# Altium PCB Sheer1.PcbDoc (part 1 of 2)
Units mil, origin at the board's own origin, x right, y up, seen from the top; angles counter-clockwise.
Board outline 7637.8 x 3799.21 mil, 2 copper layers (Top Layer, Bottom Layer); 236 components, 181 nets, 723 pads, 138 vias.
Unrouted connection lines stored in the file: 215.
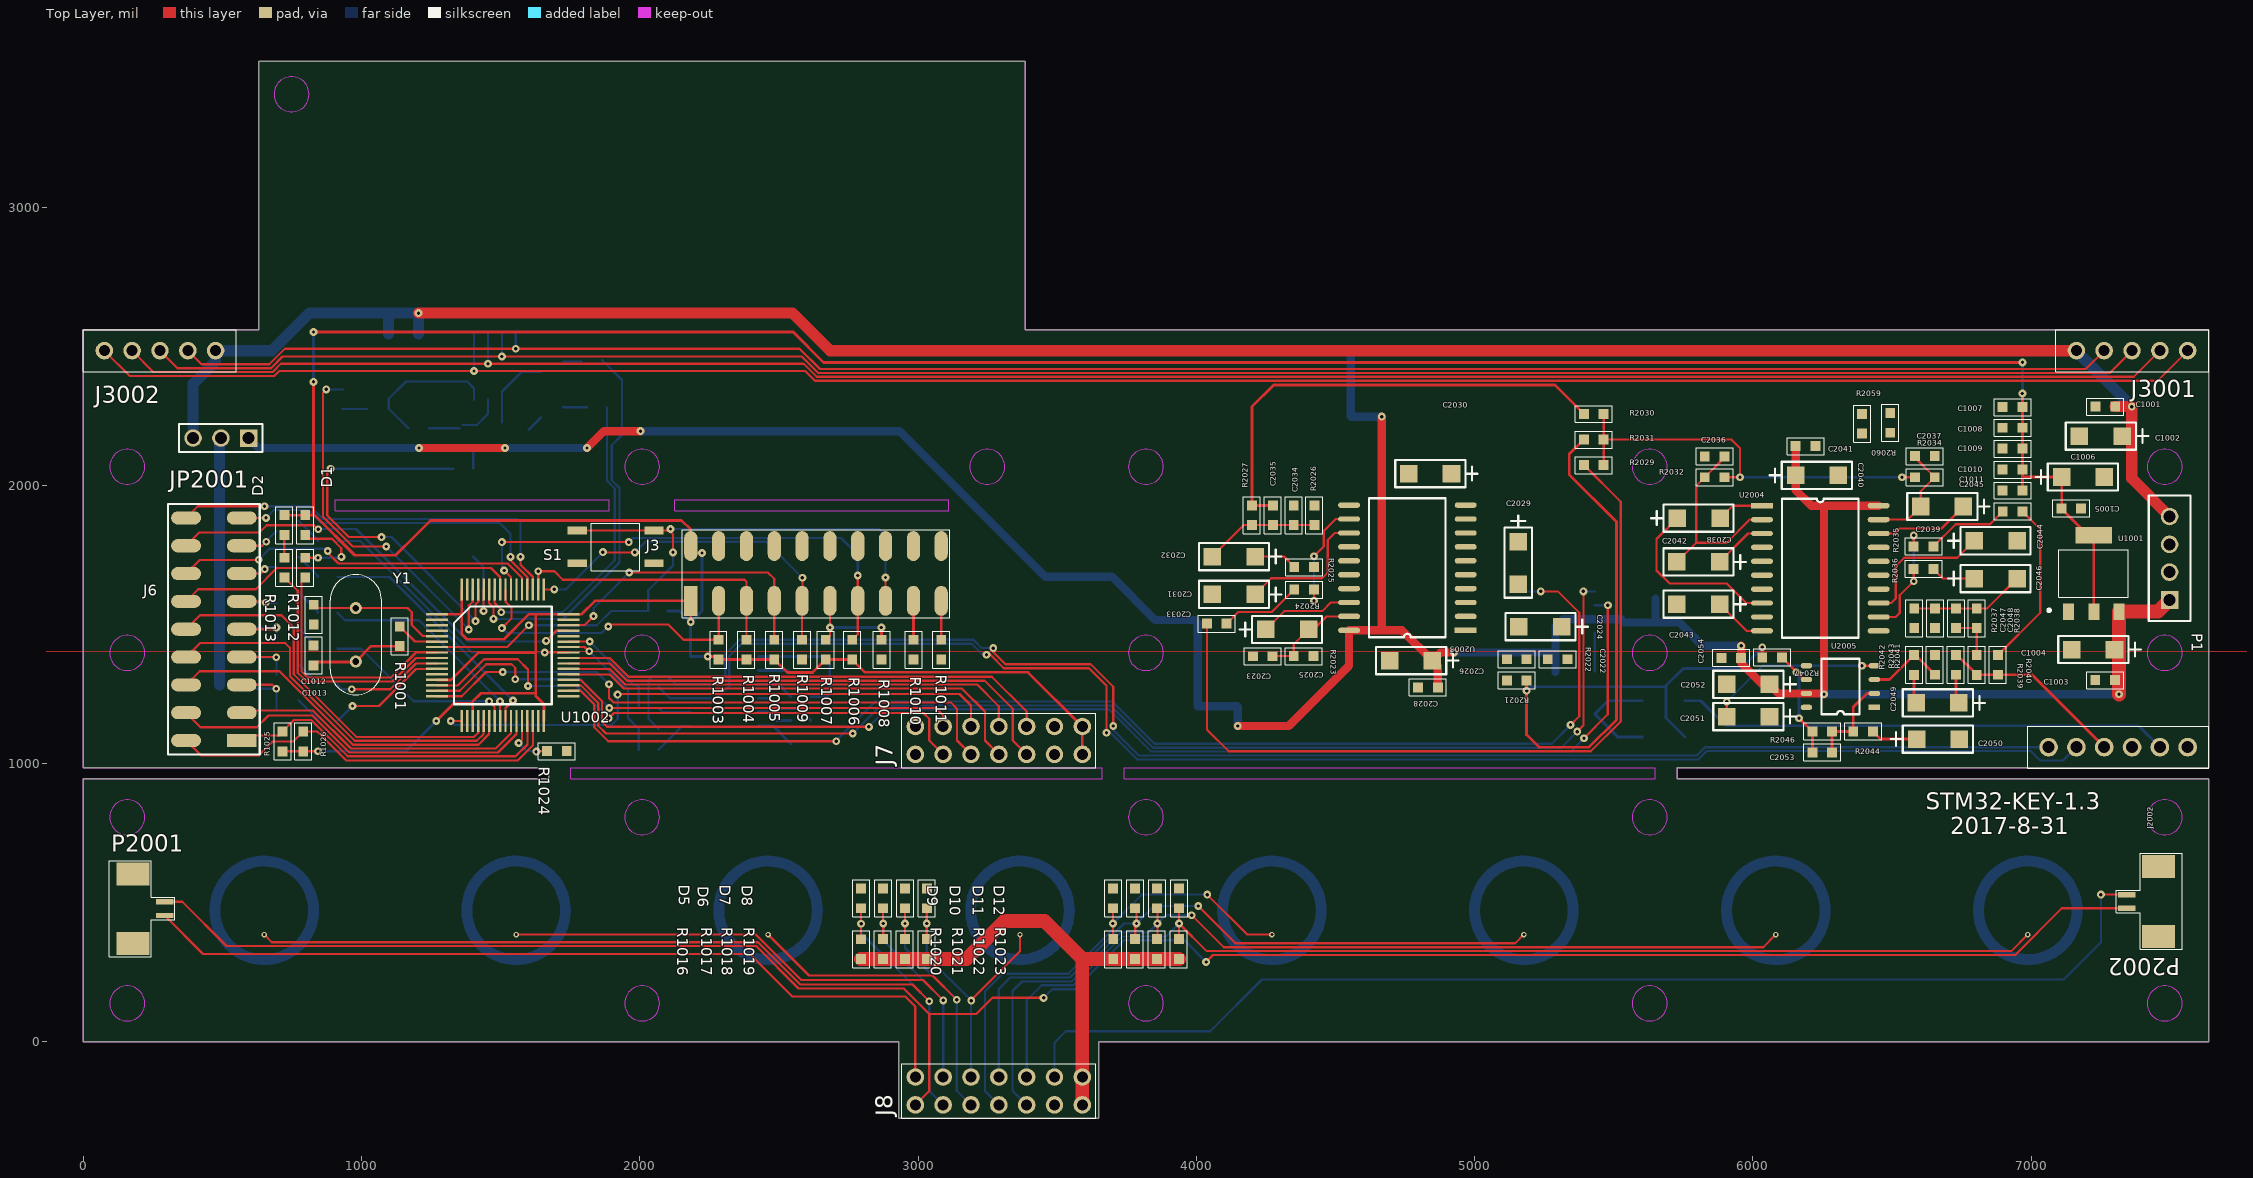
[diagram p0: Top Layer view]
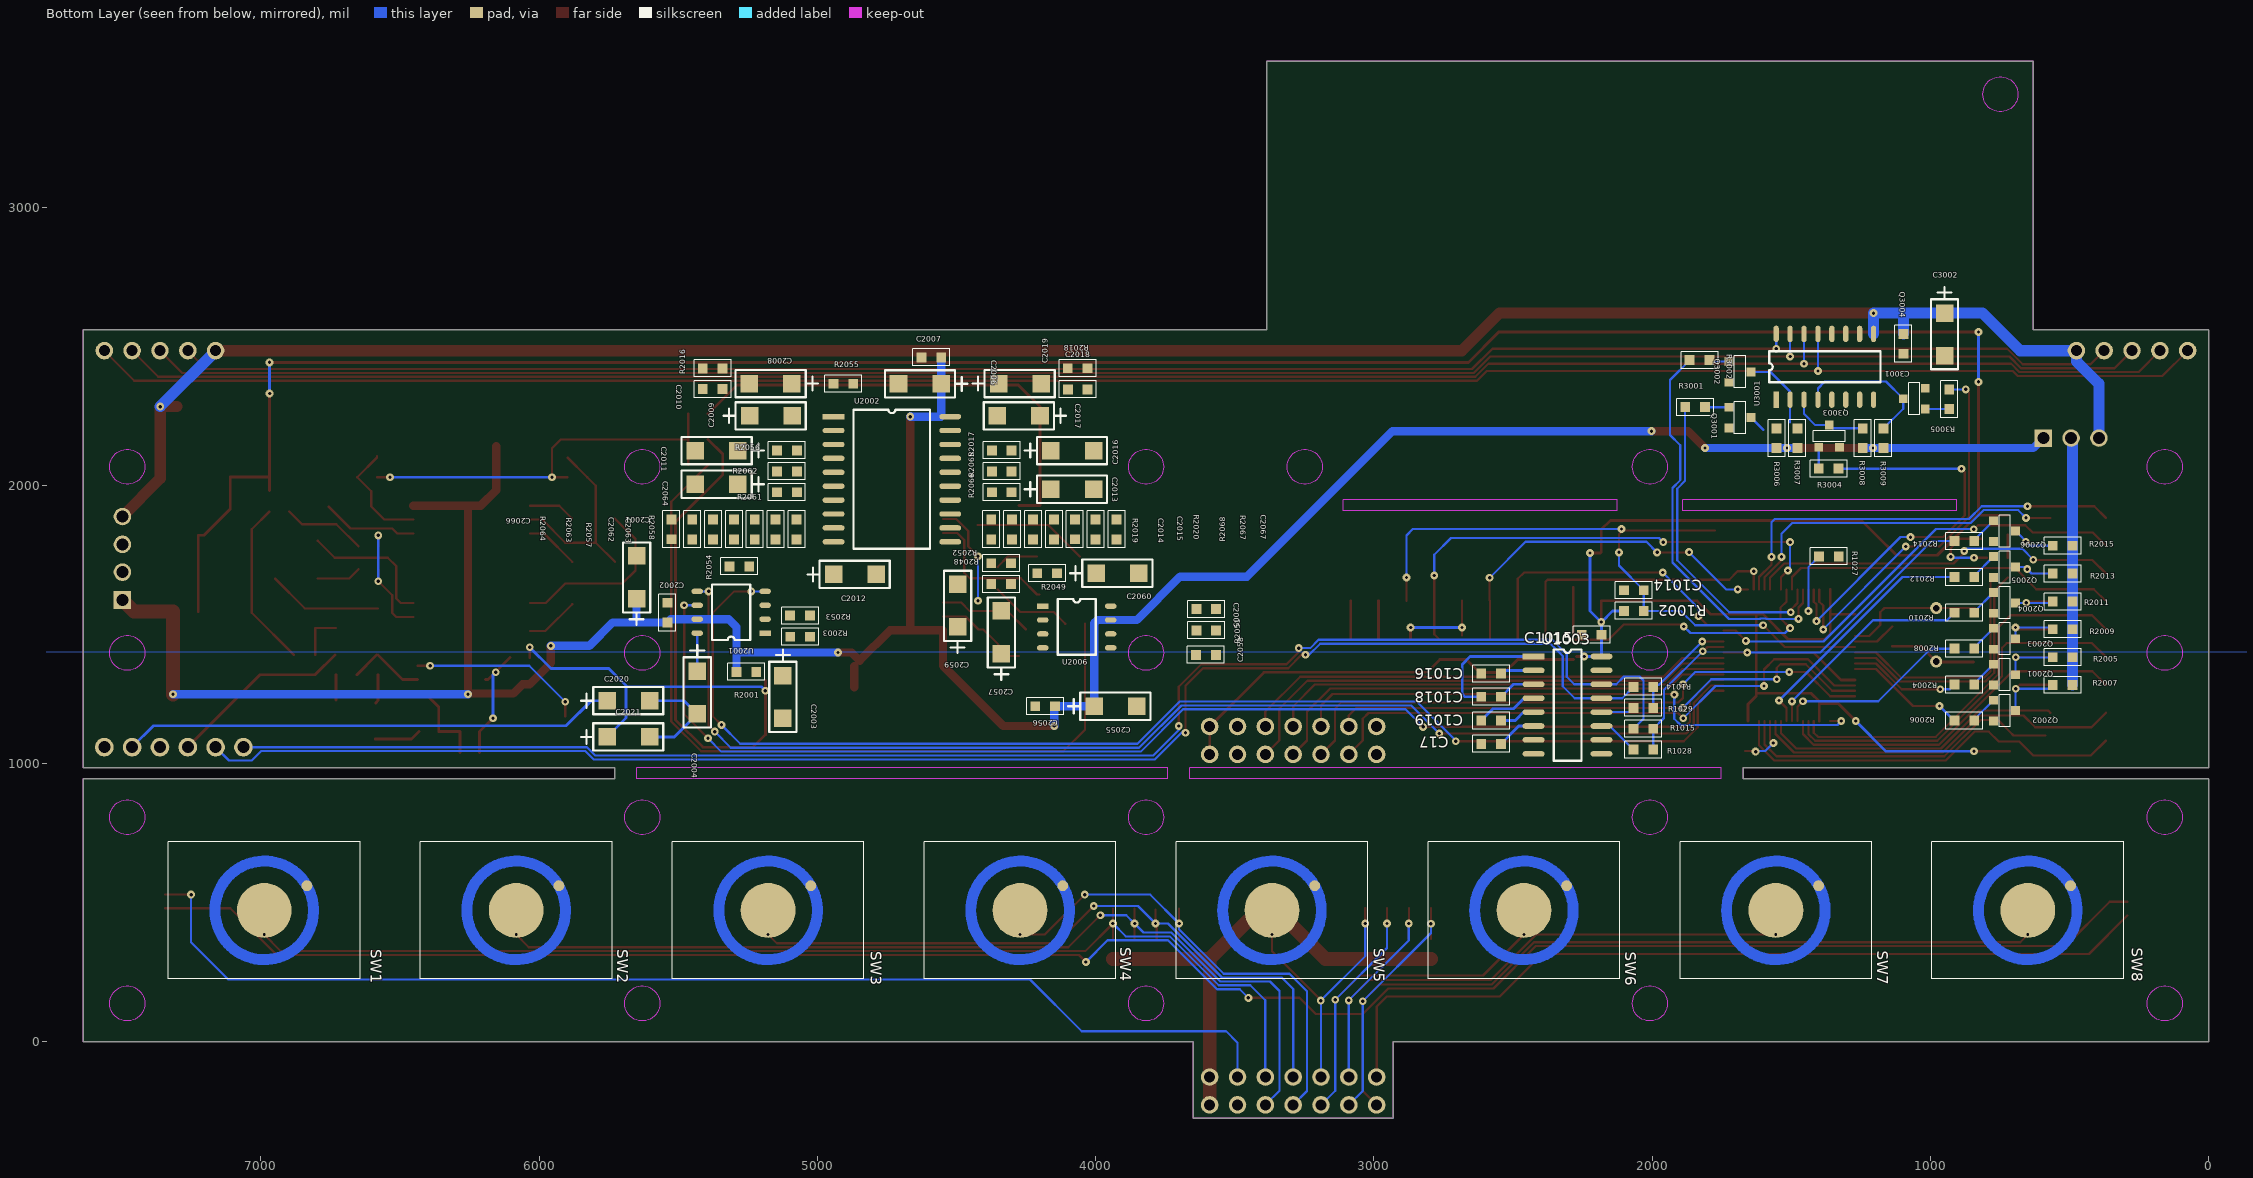
[diagram p1: Bottom Layer view, seen from below]

## Layer stack, top to bottom
Top Solder: solder mask 0.4, Solder Resist, Dk 3.5
Top Layer: signal copper 1.4
Dielectric 1: dielectric 12.6, FR-4, Dk 4.8
Bottom Layer: signal copper 1.4
Bottom Solder: solder mask 0.4, Solder Resist, Dk 3.5

## Board outline
0,0 0,944.88 1673.23,944.88 1673.23,984.25 0,984.25 0,2559.06 629.92,2559.06 629.92,3523.62 3385.83,3523.62 3385.83,2559.06 7637.8,2559.06 7637.8,984.25 5728.35,984.25 5728.35,944.88 7637.8,944.88 7637.8,0 3650,0 3650,-275.59 2930,-275.59 2930,0

## Design rules (kind name [scope] priority, off if disabled: settings)
Clearance [All] p1: gap=6
MinimumSolderMaskSliver [All] p1: minsoldermaskwidth=0
PolygonConnect [All] p1: connectstyle=Relief reliefconductorwidth=10 reliefentries=4 polygonreliefangle="90 Angle" airgapwidth=10
RoutingVias [All] p1: holewidth=28 width=50 viastyle="Through Hole" minholewidth=12 minwidth=20 maxholewidth=208 maxwidth=250
SilkToSolderMaskClearance [IsPad] p1: minsilkscreentomaskgap=0 clearancetoexposedcopper=TRUE
SolderMaskExpansion [All] p1: expansion=4
Width [All] p1: maxlimit=1000 minlimit=6 preferedwidth=10
28 further rules are at their usual default settings.

## Classes and differential pairs
component class Sheet1: C17 C1001 C1002 C1003 C1004 C1005 C1006 C1007 C1008 C1009 C1010 C1011 C1012 C1013 C1014 C1015 C1016 C1018 C1019 D1 D2 D5 D6 D7 D8 D9 D10 D11 D12 J3 J6 J7 J8 JP2001 P1 P2001 P2002 Q2001 Q2002 Q2003 Q2004 Q2005 Q2006 R1001 R1002 R1003 R1004 R1005 R1006 R1007 R1008 R1009 R1010 R1011 R1012 R1013 R1014 R1015 R1016 R1017 R1018 R1019 R1020 R1021 R1022 R1023 R1024 R1025 R1026 R1027 R1028 R1029 R2004 R2005 R2006 R2007 R2008 R2009 R2010 R2011 R2012 R2013 R2014 R2015 S1 SW1 SW2 SW3 SW4 SW5 SW6 SW7 SW8 U1001 U1002 U1003 Y1
component class Sheet3: C3001 C3002 J3001 J3002 Q3001 Q3002 Q3003 Q3004 R3001 R3002 R3004 R3005 R3006 R3007 R3008 R3009 U3001
component class Sheet2: C2001 C2002 C2003 C2004 C2005 C2006 C2007 C2008 C2009 C2010 C2011 C2012 C2013 C2014 C2015 C2016 C2017 C2018 C2019 C2020 C2021 C2022 C2023 C2024 C2025 C2026 C2028 C2029 C2030 C2031 C2032 C2033 C2034 C2035 C2036 C2037 C2038 C2039 C2040 C2041 C2042 C2043 C2044 C2045 C2046 C2047 C2048 C2049 C2050 C2051 C2052 C2053 C2054 C2055 C2056 C2057 C2058 C2059 C2060 C2062 C2063 C2064 C2066 C2067 J2002 R2001 R2003 R2016 R2017 R2018 R2019 R2020 R2021 R2022 R2023 R2024 R2025 R2026 R2027 R2029 R2030 R2031 R2032 R2034 R2035 R2036 R2037 R2038 R2039 R2040 R2041 R2042 R2043 R2044 R2046 R2047 R2048 R2049 R2051 R2052 R2053 R2054 R2055 R2056 R2057 R2058 R2059 R2060 R2061 R2062 R2063 R2064 R2065 R2066 R2067 R2068 U2001 U2002 U2003 U2004 U2005 U2006

## Components (designator, comment, footprint, x,y, rotation, side; value= is the part's Value field where it differs from the comment)
C17 "C1017" 0603 2614,1071 r180 bottom
C1001 "100PF" 0603 7232,2283 r0 top
C1002 "10UF" 7343 7201,2177 r0 top
C1003 "100PF" 0603 7231,1300 r0 top
C1004 "10UF" 7343 7174,1410 r0 top
C1005 "100PF" 0603 7180,1917 r180 top
C1006 "10UF" 7343 7236,2030 r180 top
C1007 "100nF" 0603 6898,2282 r0 top
C1008 "100nF" 0603 6898,2207 r0 top
C1009 "100nF" 0603 6898,2132 r0 top
C1010 "100nF" 0603 6898,2057 r0 top
C1011 "100nF" 0603 6898,1982 r0 top
C1012 "20pF" 0603 828,1571 r270 top
C1013 "20pF" 0603 827,1353 r90 top
C1014 "100nF" 0603 2030,1623 r0 bottom
C1015 "100nF" 0603 2253,1463 r180 bottom
C1016 "100nF" 0603 2614,1324 r180 bottom
C1018 "100nF" 0603 2614,1240 r180 bottom
C1019 "100nF" 0603 2614,1155 r180 bottom
C2001 "10UF" 7343 5650,1719 r270 bottom
C2002 "0.1UF" 0603 5539,1578 r270 bottom
C2003 "10UF" 7343 5124,1190 r90 bottom
C2004 "1UF" 7343 5432,1206 r90 bottom
C2005 "0.1UF" 0603 3638,1556 r180 bottom
C2006 "100UF" 7343 4681,2365 r180 bottom
C2007 "0.1UF" 0603 4555,2460 r0 bottom
C2008 "470UF" 7343 5218,2366 r180 bottom
C2009 "100UF" 7343 5118,2250 r0 bottom
C2010 "0.1UF" 0603 5412,2346 r180 bottom
C2011 "100UF" 7343 5412,2125 r180 bottom
C2012 "100UF" 7343 4816,1680 r0 bottom
C2013 "4.7UF" 7343 4035,1986 r0 bottom
C2014 "2200PF" 0603 4300,1806 r90 bottom
C2015 "2200PF" 0603 4225,1806 r90 bottom
C2016 "100UF" 7343 4035,2125 r0 bottom
C2017 "100UF" 7343 4326,2250 r180 bottom
C2018 "0.1UF" 0603 4029,2345 r0 bottom
C2019 "470UF" 7343 4223,2366 r0 bottom
C2020 "10UF" 7343 5630,1226 r0 bottom
C2021 "10UF" 7343 5630,1096 r0 bottom
C2022 "0.15UF" 0603 5263,1375 r0 top
C2023 "0.15UF" 0603 4274,1386 r180 top
C2024 "100UF" 7343 5187,1492 r0 top
C2025 "100UF" 7343 4376,1482 r180 top
C2026 "100UF" 7343 4722,1370 r0 top
C2028 "0.1UF" 0603 4868,1274 r180 top
C2029 "100UF" 7343 5157,1672 r90 top
C2030 "100UF" 7343 4791,2042 r0 top
C2031 "100UF" 7343 4085,1608 r0 top
C2032 "4.7UF" 7343 4085,1744 r0 top
C2033 "0.22UF" 0603 4038,1503 r0 top
C2034 "2200PF" 0603 4350,1928 r270 top
C2035 "2200PF" 0603 4275,1928 r270 top
C2036 "0.15UF" 0603 5898,2104 r180 top
C2037 "0.15UF" 0603 6583,2105 r0 top
C2038 "100UF" 7343 5755,1725 r0 top
C2039 "100UF" 7343 6631,1924 r0 top
C2040 "100UF" 7343 6280,2036 r180 top
C2041 "0.1UF" 0603 6154,2141 r0 top
C2042 "100UF" 7343 5855,1882 r180 top
C2043 "100UF" 7343 5755,1573 r0 top
C2044 "100UF" 7343 6922,1801 r180 top
C2045 "0.22UF" 0603 6969,1906 r180 top
C2046 "4.7UF" 7343 6922,1665 r180 top
C2047 "2200PF" 0603 6655,1487 r90 top
C2048 "2200PF" 0603 6730,1487 r90 top
C2049 "4.7UF" 7343 6615,1218 r0 top
C2050 "47UF" 7343 6715,1088 r180 top
C2051 "300UF" 7343 5934,1169 r0 top
C2052 "300UF" 7343 5934,1285 r0 top
C2053 "22PF" 0603 6285,1040 r180 top
C2054 "0.1UF" 0603 5958,1380 r180 top
C2055 "300UF" 7343 3879,1206 r0 bottom
C2056 "0.1UF" 0603 4146,1206 r0 bottom
C2057 "300UF" 7343 4339,1521 r270 bottom
C2058 "22PF" 0603 3568,1390 r0 bottom
C2059 "4.7UF" 7343 4496,1617 r270 bottom
C2060 "47UF" 7343 3872,1684 r0 bottom
C2062 "2200PF" 0603 5225,1806 r90 bottom
C2063 "2200PF" 0603 5150,1806 r90 bottom
C2064 "4.7UF" 7343 5412,2004 r180 bottom
C2066 "0.22UF" 0603 5524,1877 r270 bottom
C2067 "0.22UF" 0603 3925,1806 r90 bottom
C3001 "0.1UF" 0603 1096,2544 r270 bottom
C3002 "100uF" 7343 949,2493 r90 bottom
D1 "LED_BLUE" 0603 797,1822 r90 top
D2 "LED_BLUE" 0603 722,1822 r90 top
D5 "TVS*" 0603 2795.02,480 r90 top
D6 "TVS*" 0603 2873.76,480 r90 top
D7 "TVS*" 0603 2952.5,480 r90 top
D8 "TVS*" 0603 3031.24,480 r90 top
D9 "TVS*" 0603 3700.98,480 r90 top
D10 "TVS*" 0603 3779.72,480 r90 top
D11 "TVS*" 0603 3858.46,480 r90 top
D12 "TVS*" 0603 3937.2,480 r90 top
J3 "JTAG" SOP20 2183,1585 r90 top
J6 "SOPP18" SOP18 569,1083 r180 top
J7 "SIP2X7" DB2X7-2.54 2990,1033.27 r90 top
J8 "SIP2X7" DB2X7-2.54 2990,-226.57 r90 top
J2002 "SIP6" SIP6 7563,1059 r180 top
J3001 "SIP5" SIP5 7563,2484 r270 top
J3002 "SIP5" SIP5 75,2484 r90 top
JP2001 "SIP3" SIP3 594,2170 r180 top
P1 "SIP4" SIP4 7498,1588 r0 top
P2001 "SIP2" 1.25T-2P 292,454 r90 top
P2002 "SIP2" 1.25T-2P 7344,529 r270 top
Q2001 "BC-817" S9013 773,1357 r270 bottom
Q2002 "BC-817" S9013 773,1228 r270 bottom
Q2003 "BC-817" S9013 773,1486 r270 bottom
Q2004 "BC-817" S9013 773,1615 r270 bottom
Q2005 "BC-817" S9013 773,1744 r270 bottom
Q2006 "BC-817" S9013 773,1873 r270 bottom
Q3001 "BC-817" S9013 1724,2281 r270 bottom
Q3002 "BC-817" S9013 1724,2445 r270 bottom
Q3003 "BC-817" S9013 1401,2137 r180 bottom
Q3004 "BC-817" S9013 1018,2274 r90 bottom
R1001 "390R" 0603 1137,1422 r90 top
R1002 "10K" 0603 2030,1548 r0 bottom
R1003 "10K" 0603 2283,1445 r270 top
R1004 "10K" 0603 2383,1445 r270 top
R1005 "10K" 0603 2483,1445 r270 top
R1006 "10K" 0603 2763,1445 r270 top
R1007 "0R" 0603 2668,1445 r270 top
R1008 "10K" 0603 2868,1374 r90 top
R1009 "10K" 0603 2583,1374 r90 top
R1010 "10K" 0603 2983,1374 r90 top
R1011 "10K" 0603 3083,1374 r90 top
R1012 "1K" 0603 797,1669 r90 top
R1013 "1K" 0603 722,1669 r90 top
R1014 "0" 0603 1996,1275 r0 bottom
R1015 "0" 0603 1996,1125 r0 bottom
R1016 "10K" 0603 2795.28,298 r90 top
R1017 "10K" 0603 2874.02,369 r270 top
R1018 "10K" 0603 2952.76,369 r270 top
R1019 "10K" 0603 3031.5,369 r270 top
R1020 "10K" 0603 3701.24,369 r270 top
R1021 "10K" 0603 3779.98,369 r270 top
R1022 "10K" 0603 3858.72,369 r270 top
R1023 "10K" 0603 3937.46,369 r270 top
R1024 "10K" 0603 1666,1045 r0 top
R1025 "10K" 0603 715,1044 r90 top
R1026 "10K" 0603 790,1044 r90 top
R1027 "10K" 0603 1329,1744 r0 bottom
R1028 "0" 0603 1996,1050 r0 bottom
R1029 "0" 0603 1996,1200 r0 bottom
R2001 "330R" 0603 5220,1329 r0 bottom
R2003 "330R" 0603 5027,1456 r0 bottom
R2004 "3.3K" 0603 913,1284 r180 bottom
R2005 "10K" 0603 489,1382 r0 bottom
R2006 "3.3K" 0603 913,1155 r180 bottom
R2007 "10K" 0603 560,1283 r180 bottom
R2008 "3.3K" 0603 913,1413 r180 bottom
R2009 "10K" 0603 560,1483 r180 bottom
R2010 "3.3K" 0603 913,1542 r180 bottom
R2011 "10K" 0603 560,1583 r180 bottom
R2012 "3.3K" 0603 913,1671 r180 bottom
R2013 "10K" 0603 560,1683 r180 bottom
R2014 "3.3K" 0603 913,1800 r180 bottom
R2015 "10K" 0603 560,1783 r180 bottom
R2016 "4.7R" 0603 5341,2420 r0 bottom
R2017 "330R" 0603 4302,2125 r0 bottom
R2018 "4.7R" 0603 4100,2421 r180 bottom
R2019 "4.7K" 0603 4375,1806 r90 bottom
R2020 "10K" 0603 4150,1806 r90 bottom
R2021 "0" 0603 5187,1299 r180 top
R2022 "0" 0603 5116,1375 r0 top
R2023 "0" 0603 4350,1387 r0 top
R2024 "0" 0603 4352.02,1626 r0 top
R2025 "0" 0603 4352.02,1707 r0 top
R2026 "4.7K" 0603 4425.02,1928 r270 top
R2027 "10K" 0603 4200,1928 r270 top
R2029 "0" 0603 5393,2073 r0 top
R2030 "0" 0603 5393,2257 r0 top
R2031 "0" 0603 5393,2165 r0 top
R2032 "0" 0603 5898,2029 r180 top
R2034 "0" 0603 6654,2029 r180 top
R2035 "0" 0603 6649,1780 r180 top
R2036 "0" 0603 6649,1699 r180 top
R2037 "4.7K" 0603 6580,1487 r90 top
R2038 "10K" 0603 6805,1487 r90 top
R2039 "0" 0603 6805,1319 r90 top
R2040 "0" 0603 6881,1390 r270 top
R2041 "0" 0603 6730,1390 r270 top
R2042 "1K" 0603 6579,1319 r90 top
R2043 "47K" 0603 6655,1390 r270 top
R2044 "1K" 0603 6432,1115 r180 top
R2046 "10K" 0603 6285,1115 r180 top
R2047 "0" 0603 6105,1381 r180 top
R2048 "1K" 0603 4375,1645 r180 bottom
R2049 "1K" 0603 4139,1684 r0 bottom
R2051 "10K" 0603 3567,1478 r0 bottom
R2052 "47K" 0603 4375,1720 r180 bottom
R2053 "0" 0603 5098,1532 r180 bottom
R2054 "0" 0603 5245,1709 r0 bottom
R2055 "0" 0603 4871,2365 r0 bottom
R2056 "330R" 0603 5074,2125 r0 bottom
R2057 "10K" 0603 5300,1806 r90 bottom
R2058 "4.7K" 0603 5075,1806 r90 bottom
R2059 "0" 0603 6393,2186 r90 top
R2060 "0" 0603 6494,2260 r270 top
R2061 "0" 0603 5074,1975 r0 bottom
R2062 "0" 0603 5074,2050 r0 bottom
R2063 "0" 0603 5375,1806 r90 bottom
R2064 "0" 0603 5450,1806 r90 bottom
R2065 "0" 0603 4302,2050 r0 bottom
R2066 "0" 0603 4302,1975 r0 bottom
R2067 "0" 0603 4000,1806 r90 bottom
R2068 "0" 0603 4074,1877 r270 bottom
R3001 "3.3K" 0603 1881,2281 r180 bottom
R3002 "3.3K" 0603 1865,2450 r180 bottom
R3004 "3.3K" 0603 1330,2060 r0 bottom
R3005 "3.3K" 0603 932,2345 r270 bottom
R3006 "10K" 0603 1553,2134 r90 bottom
R3007 "10K" 0603 1477,2205 r270 bottom
R3008 "10K" 0603 1243,2205 r270 bottom
R3009 "10K" 0603 1168,2205 r270 bottom
S1 "INT0" SW 1775,1838 r270 top (schematic designator SW1)
SW1 "KEYPAD_D5_3_5" AJB-9MM 6988.19,472.44 r180 bottom (schematic designator SW9)
SW2 "KEYPAD_D5_3_5" AJB-9MM 6082.68,472.44 r180 bottom (schematic designator SW8)
SW3 "KEYPAD_D5_3_5" AJB-9MM 5177.17,472.44 r180 bottom (schematic designator SW7)
SW4 "KEYPAD_D5_3_5" AJB-9MM 4271.65,472.44 r180 bottom (schematic designator SW6)
SW5 "KEYPAD_D5_3_5" AJB-9MM 3366.14,472.44 r180 bottom
SW6 "KEYPAD_D5_3_5" AJB-9MM 2460.63,472.44 r180 bottom (schematic designator SW4)
SW7 "KEYPAD_D5_3_5" AJB-9MM 1555.12,472.44 r180 bottom (schematic designator SW3)
SW8 "KEYPAD_D5_3_5" AJB-9MM 649.61,472.44 r180 bottom (schematic designator SW2)
U1001 "LM1117" LM1117 7135,1546 r0 top
U1002 "STM32F103R8T6" STM32F103R8T6 1271,1537 r0 top
U1003 "SP3232E" SP3232E-SOIC 2426,1385 r180 bottom
U2001 "LM1971" TJA1040 5188,1469 r0 bottom
U2002 "TEA2025B" TEA2025B 4942,2247 r180 bottom
U2003 "TEA2025B" TEA2025B 4968,1479 r180 top
U2004 "TEA2025B" TEA2025B 6033,1927 r0 top
U2005 "NE5534" SP2526A 6437,1202 r180 top
U2006 "NE5534" SP2526A 4190,1566 r180 bottom
U3001 "ULN2003" ULN2003A 1554,2308 r90 bottom
Y1 "8MHz" HC-49S 979,1559 r270 top

## Footprints (in the part's own frame and the unit in brackets; to place one, negate y for a bottom-side part, rotate by r counter-clockwise, add the part's x,y. Pads: shape width x height; smd on the part's side, far side on the other; paste and mask are expansions set on the pad)
1.25T-2P [mm]
  rect 0.5x1.6 smd: 1(0,0) 2(1.25,0)
  rect 2.1x3 smd: 3(3.8,2.9) 4(-2.55,2.9)
  silkscreen extent -3.76,-0.94 5,5.08
0603 [mm]
  rect 0.9x0.9 smd: 1(0,0) 2(1.8,0)
  silkscreen extent -0.79,-0.79 2.59,0.76
7343 [mm]
  rect 1.6x1.6 smd: 1(3.2,0) 2(-0.7,0)
  silkscreen extent -1.93,-1.24 5.59,1.24
AJB-9MM [mm]
  round 5 smd: 1(0,0)
  round 1 smd: 2(3.897,2.25)
  Top Layer circle w1: c0,0 r4.5
  silkscreen extent -8.75,-6.25 8.75,6.25
DB2X7-2.54 [mm]
  round 1.6 hole 1: 1(0,0) 2(2.54,0) 3(0,-2.54) 4(2.54,-2.54) 5(0,-5.08) 6(2.54,-5.08) 7(0,-7.62) 8(2.54,-7.62) 9(0,-10.16) 10(2.54,-10.16) 11(0,-12.7) 12(2.54,-12.7) 13(0,-15.24) 14(2.54,-15.24)
  silkscreen extent -1.23,-16.47 3.77,1.23
HC-49S [mm]
  round 1.1 hole 0.6: 1(0,0) 2(4.88,0)
  silkscreen extent -3.05,-2.35 7.93,2.35
LM1117 [mm]
  rect 1x1.5 smd: 1(0,0) 2(2.3,0) 3(4.6,0)
  rect 3.3x1.5 smd: 4(2.3,6.98)
  silkscreen extent -1.9,0 5.46,5.64
S9013 [mm]
  rect 0.8x0.8 smd: 1(0,0) 2(1.9,0) 3(0.95,2.02)
  silkscreen extent -0.51,0.51 2.41,1.52
SIP3 [mm]
  rect 1.6x1.6 hole 1.1: 1(0,0)
  round 1.6 hole 1.1: 2(2.54,0) 3(5.08,0)
  silkscreen extent -1.27,-1.27 6.35,1.27
SIP4 [mm]
  rect 1.6x1.6 hole 1.1: 1(0,0)
  round 1.6 hole 1.1: 2(0,2.54) 3(0,5.08) 4(0,7.62)
  silkscreen extent -1.91,-1.91 1.91,9.53
SIP5 [mm]
  round 1.6 hole 1: 1(0,0) 2(0,-2.54) 3(0,-5.08) 4(0,-7.62) 5(0,-10.16)
  silkscreen extent -1.91,-12.06 1.91,1.91
SIP6 [mm]
  round 1.7 hole 1.1: 1(0,0) 2(2.54,0) 3(5.08,0) 4(7.62,0) 5(10.16,0) 6(12.7,0)
  silkscreen extent -1.91,-1.91 14.6,1.91
SOP18 [mm]
  rect 2.73x1.2 smd: 1(0,0)
  oval 2.73x1.2 smd: 2(5.08,0) 3(0,-2.54) 4(5.08,-2.54) 5(0,-5.08) 6(5.08,-5.08) 7(0,-7.62) 8(5.08,-7.62) 9(0,-10.16) 10(5.08,-10.16) 11(0,-12.7) 12(5.08,-12.7) 13(0,-15.24) 14(5.08,-15.24) 15(0,-17.78) 16(5.08,-17.78) 17(0,-20.32) 18(5.08,-20.32)
  silkscreen extent -1.65,-21.59 6.73,1.27
SOP20 [mm]
  rect 2.73x1.2 smd: 1(0,0)
  oval 2.73x1.2 smd: 2(5,0) 3(0,-2.54) 4(5,-2.54) 5(0,-5.08) 6(5,-5.08) 7(0,-7.62) 8(5,-7.62) 9(0,-10.16) 10(5,-10.16) 11(0,-12.7) 12(5,-12.7) 13(0,-15.24) 14(5,-15.24) 15(0,-17.78) 16(5,-17.78) 17(0,-20.32) 18(5,-20.32) 19(0,-22.86) 20(5,-22.86)
  silkscreen extent -1.52,-23.62 6.5,0.76
SP2526A [mm]
  rect 1.05x0.49 smd: 1(0,0)
  oval 1.05x0.49 smd: 2(0,-1.27) 3(0,-2.54) 4(0,-3.81) 5(6.2,-3.81) 6(6.2,-2.54) 7(6.2,-1.27) 8(6.2,0)
  silkscreen extent 1.36,-4.44 4.84,0.64
SP3232E-SOIC [mil]
  rect 78.74x20 smd: 1(0,0)
  oval 78.74x20 smd: 2(0,-50) 3(0,-100) 4(0,-150) 5(0,-200) 6(0,-250) 7(0,-300) 8(0,-350) 9(244.02,-350) 10(244.02,-300) 11(244.02,-250) 12(244.02,-200) 13(244.02,-150) 14(244.02,-100) 15(244.02,-50) 16(244.02,0)
  silkscreen extent 72,-375 172,25
STM32F103R8T6 [mm]
  oval 2x0.22 smd: 1(0,0)
  rect 2x0.22 smd: 2(0,-0.5) 3(0,-1) 4(0,-1.5) 5(0,-2) 6(0,-2.5) 7(0,-3) 8(0,-3.5) 9(0,-4) 10(0,-4.5) 11(0,-5) 12(0,-5.5) 13(0,-6) 14(0,-6.5) 15(0,-7) 16(0,-7.5) 33(12,-7.5) 34(12,-7) 35(12,-6.5) 36(12,-6) 37(12,-5.5) 38(12,-5) 39(12,-4.5) 40(12,-4) 41(12,-3.5) 42(12,-3) 43(12,-2.5) 44(12,-2) 45(12,-1.5) 46(12,-1) 47(12,-0.5) 48(12,0)
  rect 0.22x2 smd: 17(2.25,-9.75) 18(2.75,-9.75) 19(3.25,-9.75) 20(3.75,-9.75) 21(4.25,-9.75) 22(4.75,-9.75) 23(5.25,-9.75) 24(5.75,-9.75) 25(6.25,-9.75) 26(6.75,-9.75) 27(7.25,-9.75) 28(7.75,-9.75) 29(8.25,-9.75) 30(8.75,-9.75) 31(9.25,-9.75) 32(9.75,-9.75) 49(9.75,2.25) 50(9.25,2.25) 51(8.75,2.25) 52(8.25,2.25) 53(7.75,2.25) 54(7.25,2.25) 55(6.75,2.25) 56(6.25,2.25) 57(5.75,2.25) 58(5.25,2.25) 59(4.75,2.25) 60(4.25,2.25) 61(3.75,2.25) 62(3.25,2.25) 63(2.75,2.25) 64(2.25,2.25)
  silkscreen extent 1.54,-8.21 10.46,0.71
SW [mm]
  rect 0.7x1.75 smd: 1(0,0) 2(0,7) 3(3,0) 4(3,7)
  silkscreen extent -0.64,1.27 3.68,5.72
TEA2025B [mm]
  rect 2x0.49 smd: 1(0,0)
  oval 2x0.49 smd: 2(0,-1.27) 3(0,-2.54) 4(0,-3.81) 5(0,-5.08) 6(0,-6.35) 7(0,-7.62) 8(0,-8.89) 9(0,-10.16) 10(0,-11.43) 11(10.65,-11.43) 12(10.65,-10.16) 13(10.65,-8.89) 14(10.65,-7.62) 15(10.65,-6.35) 16(10.65,-5.08) 17(10.65,-3.81) 18(10.65,-2.54) 19(10.65,-1.27) 20(10.65,0)
  silkscreen extent 1.84,-12.07 8.81,0.63
TJA1040 [mm]
  rect 1.05x0.49 smd: 1(0,0)
  oval 1.05x0.49 smd: 2(0,-1.27) 3(0,-2.54) 4(0,-3.81) 5(6.2,-3.81) 6(6.2,-2.54) 7(6.2,-1.27) 8(6.2,0)
  silkscreen extent 1.36,-4.44 4.84,0.64
ULN2003A [mm]
  rect 1.5x0.48 smd: 1(0,0)
  oval 1.5x0.48 smd: 2(0,-1.27) 3(0,-2.54) 4(0,-3.81) 5(0,-5.08) 6(0,-6.35) 7(0,-7.62) 8(0,-8.89) 9(6,-8.89) 10(6,-7.62) 11(6,-6.35) 12(6,-5.08) 13(6,-3.81) 14(6,-2.54) 15(6,-1.27) 16(6,0)
  silkscreen extent 1.58,-9.53 4.42,0.63

## Part data
C17 C1001 C1003 C1005 C1007 C1008 C1009 C1010 C1011 C1012 C1013 C1014 C1015 C1016 C1018 C1019 C2002 C2005 C2007 C2010 C2014 C2015 C2018 C2022 C2023 C2028 C2033 C2034 C2035 C2036 C2037 C2041 C2045 C2047 C2048 C2053 C2054 C2056 C2058 C2062 C2063 C2066 C2067 C3001: library part C
C1002 C1004 C1006 C2006 C2008 C2009 C2011 C2012 C2013 C2016 C2017 C2019 C2020 C2021 C2024 C2025 C2026 C2029 C2030 C2031 C2032 C2038 C2039 C2040 C2042 C2043 C2044 C2046 C2049 C2050 C2051 C2052 C2055 C2057 C2059 C2060 C2064: library part JC
C2001 C2003 C2004: library part EC
C3002: library part 极性电容
D5 D6 D7 D8 D9 D10 D11 D12: library part TVS
R1001 R1002 R1003 R1004 R1005 R1006 R1007 R1008 R1009 R1010 R1011 R1012 R1013 R1014 R1015 R1016 R1017 R1018 R1019 R1020 R1021 R1022 R1023 R1024 R1025 R1026 R1027 R1028 R1029 R2001 R2003 R2004 R2005 R2006 R2007 R2008 R2009 R2010 R2011 R2012 R2013 R2014 R2015 R2016 R2017 R2018 R2019 R2020 R2021 R2022 R2023 R2024 R2025 R2026 R2027 R2029 R2030 R2031 R2032 R2034 R2035 R2036 R2037 R2038 R2039 R2040 R2041 R2042 R2043 R2044 R2046 R2047 R2048 R2049 R2051 R2052 R2053 R2054 R2055 R2056 R2057 R2058 R2059 R2060 R2061 R2062 R2063 R2064 R2065 R2066 R2067 R2068 R3001 R3002 R3004 R3005 R3006 R3007 R3008 R3009: library part R
Y1: library part CRYSTAL

## Via types
v1: diameter 28, hole 12, Top Layer to Bottom Layer, 130 vias
v2: diameter 19.68, hole 9.84, Top Layer to Bottom Layer, 8 vias

## Nets (pads, with @x,y where several pads share a name; then routed paths per layer and width w, separated by ;. In a path a pad name is that pad's centre, name@x,y a point inside that pad or via, vN(x,y) a via of type N, cw(c..) or ccw(c..) an arc to the next point about the centre after c; other vN are vias at no path point)
1C: J3001.4 J3002.4 U3001.16 | length 7042.3
  Top Layer w8: J3002.4@375,2484 424,2435 668,2435 724,2491 v1(1554,2491) 2574,2491 2647,2418 7197,2418 J3001.4@7263,2484
  Bottom Layer w8: v1(1554,2491) U3001.16@1554,2544.22
2C: J3001.3 J3002.3 U3001.15 | length 7270.3
  Top Layer w8: J3002.3@275,2484 338,2421 673.8,2421 715.8,2463 v1(1504,2463) 2582.2,2463 2641.2,2404 7283,2404 J3001.3@7363,2484
  Bottom Layer w8: v1(1504,2463) U3001.15@1504,2544.22
3C: J3001.2 J3002.2 U3001.14 | length 7497.9
  Top Layer w8: J3002.2@175,2484 252,2407 679.6,2407 709.6,2437 v1(1454,2437) 2588.4,2437 2635.4,2390 7369,2390 J3001.2@7463,2484
  Bottom Layer w8: v1(1454,2437) U3001.14@1454,2544.22
3V3: C1005.2 C1006.1 C1007.2 C1008.2 C1009.2 C1010.2 C1011.2 C1015.2 D1.2 D2.2 J3.1 J3.2 J7.13 J7.14 J8.13 J8.14 R1002.2 R1003.2 R1004.2 R1005.2 R1006.2 R1007.2 R1016.1 R1017.2 R1018.2 R1019.2 R1020.2 R1021.2 R1022.2 R1023.2 R1025.1 R1026.1 U1001.2 U1001.4 U1002.1 U1002.13 U1002.19 U1002.32 U1002.48 U1002.64 U1003.16 | length 16651.6
  Top Layer w10: R1025.1@715,1044 R1026.1@790,1044 v1(843,1044) ; D2.2@722,1892.87 D1.2@797,1892.87 831.13,1892.87 975,1749 1121.79,1749 1131.29,1758.51 1131.51,1758.51 1186,1813 1247,1874 2150,1874 2183,1841 J3.2@2183,1781.85 J3.2@2183,1760 ; 827,1897 v1(827,2372) ; v1(827,2551) 2551,2551 2660,2442 v1(6969,2442) ; v1(1268,1153) 1331,1216 1398.95,1216 ; U1002.13@1271,1300.78 1320.78,1300.78 1418,1398 1626,1398 ; U1002.1@1271,1537 1357.58,1537 ; U1002.64@1359.58,1625.58 1359.58,1466.42 1379,1447 1512,1447 1602,1537 1626,1537 ; U1002.19@1398.95,1153.14 1398.95,1216 ; 1624,1253 1429,1253 1398.95,1222.95 1398.95,1216 ; U1002.32@1654.86,1153.14 1654.86,1213.14 1626,1242 1626,1398 ; v1(2183,1509) J3.1@2183,1585 1839,1585 1791,1537 U1002.48@1743.44,1537 1626,1537 ; J3.2@2186,1757 v1(2223,1757) ; v1(2244,1385) R1003.2@2272.13,1385 ; R1003.2@2283,1374.13 R1004.2@2383,1374.13 R1005.2@2483,1374.13 2530.13,1327 2620.87,1327 R1007.2@2668,1374.13 R1006.2@2763,1374.13 2809.13,1328 3395.27,1328 J7.14@3590,1133.27 J7.13@3590,1033.27 ; C1011.2@6968.87,1982 C1010.2@6968.87,2057 C1009.2@6968.87,2132 C1008.2@6968.87,2207 C1007.2@6968.87,2282 v1(6968.87,2330.13) ; 6971.87,2030 C1006.1@7110.02,2030 7110.02,1916.12 7205.33,1820.8 U1001.4@7225.55,1820.8 U1001.2@7225.55,1546 ; 1626,1398 1626,1537
  Top Layer w50: R1016.1@2795.28,298 3174,298 3310,434 3454,434 3590,298 ; J8.13@3590,-226.57 J8.14@3590,-126.57 3590,298 ; R1023.2@3937.32,298 3590,298
  Bottom Layer w10: v1(827,2372) v1(827,2551) ; v1(843,1044) 1159,1044 v1(1268,1153) ; R1002.2@2100.87,1548 2142.27,1548 2182.13,1508.13 C1015.2@2182.13,1463 ; C1015.2@2181.98,1462.85 U1003.16@2181.98,1385 v1(2244,1385) ; v1(2183,1509) 2223,1549 v1(2223,1757) ; v1(6968.87,2330.13) 6968.87,2441.87 v1(6969,2442)
4C: J3001.1 J3002.1 U3001.13 | length 7725.6
  Top Layer w8: J3002.1@75,2484 166,2393 685.4,2393 703.4,2411 v1(1404,2411) 2594.6,2411 2629.6,2376 7455,2376 J3001.1@7563,2484
  Bottom Layer w8: v1(1404,2411) U3001.13@1404,2544.22
BGND: C2022.2 C2023.2 C2036.2 C2037.2 J7.1 R2016.1 R2018.1 R2060.2
DGND: C2003.2 C2011.2 C2014.1 C2016.2 C2031.2 C2034.1 C2044.2 C2047.1 C2050.2 C2060.2 C2063.1 J2002.1 J2002.3 R2003.1 R2019.1 R2026.1 R2037.1 R2043.1 R2052.1 R2058.1 R2059.1 U2003.9 U2004.9
GND: C17.1 C1001.1 C1002.2 C1003.1 C1004.2 C1005.1 C1006.2 C1007.1 C1008.1 C1009.1 C1010.1 C1011.1 C1012.2 C1013.2 C1014.2 C1015.1 C1016.1 C2001.2 C2002.1 C2006.2 C2007.2 C2012.2 C2026.2 C2028.2 C2030.2 C2040.2 C2041.2 C2043.2 C2051.1 C2051.2 C2052.2 C2054.2 C2055.2 C2056.2 C2057.1 C2057.2 C3001.2 C3002.2 D5.2 D6.2 D7.2 D8.2 D9.2 D10.2 D11.2 D12.2 J3.4 J3.6 J3.8 J3.10 J3.12 J3.14 J3.16 J3.18 J3.20 J7.11 J8.11 P1.2 P1.3 Q2001.2 Q2002.2 Q2003.2 Q2004.2 Q2005.2 Q2006.2 Q3001.2 Q3002.2 Q3003.2 Q3004.2 R1008.1 R1009.1 R1010.1 R1011.1 R1024.2 R1027.1 R2055.1 R2059.2 R2060.1 S1.3 S1.4 SW1.2 SW2.2 SW3.2 SW4.2 SW5.2 SW6.2 SW7.2 SW8.2 U1001.1 U1002.12 U1002.18 U1002.31 U1002.47 U1002.63 U1003.15 U2001.3 U2002.4 U2002.5 U2002.6 U2002.7 U2002.11 U2002.14 U2002.15 U2002.16 U2002.17 U2003.4 U2003.5 U2003.6 U2003.7 U2003.11 U2003.14 U2003.15 U2003.16 U2003.17 U2004.4 U2004.5 U2004.6 U2004.7 U2004.11 U2004.14 U2004.15 U2004.16 U2004.17 U2005.4 U2006.4 U3001.8 | length 637.4
  Top Layer w8: C2051.2@5906,1169.44 v1(5906,1222) ; v1(6392,1352) U2005.4@6437,1352
  Bottom Layer w8: v1(5906,1222) 6036,1352 v1(6392,1352)
KEY1: J7.10 U1002.40 | length 1780
  Top Layer w8: U1002.40@1743.44,1379.52 1891.88,1379.52 1959.4,1312 3265,1312 3390,1187 J7.10@3390,1133.27
KEY1-1: D12.1 J8.10 R1023.1 SW1.1 | length 4163.4
  Top Layer w8: R1023.1@3938,369.54 v1(3938,425) ; D12.1@3938,479.2 v1(3938,425) ; v2(6988.19,385.44) 6928.75,326 4037,326 v1(3938,425)
  Bottom Layer w8: J8.10@3390,-126.57 3390,149 3444,203 3557.8,203 3733.8,379 3892,379 v1(3938,425)
KEY2: J7.9 U1002.39 | length 1848.5
  Top Layer w8: U1002.39@1743.44,1359.84 1891.76,1359.84 1953.6,1298 3239,1298 3340,1197 3340,1083.27 J7.9@3390,1033.27
KEY2-1: D11.1 J8.9 R1022.1 SW2.1 | length 3461.7
  Top Layer w8: R1022.1@3860,370.28 v1(3860,425) D11.1@3860,478.46 ; v1(3983,455) 4098,340 6037.24,340 v2(6082.68,385.44)
  Bottom Layer w8: J8.9@3390,-226.57 3339,-175.57 3339,183 3373,217 3552,217 3728,393 3828,393 v1(3860,425) 3890,455 v1(3983,455)
KEY3: J7.8 U1002.38 | length 1674.9
  Top Layer w8: U1002.38@1743.44,1340.15 1891.65,1340.15 1947.8,1284 3212,1284 3290,1206 J7.8@3290,1133.27
KEY3-1: D10.1 J8.8 R1021.1 SW3.1 | length 2496.4
  Top Layer w8: R1021.1@3779.98,369 v1@3779.98,419.98 ; v1(3785,425) D10.1@3785,474.72 ; v1(4007,488) 4141,354 5145.72,354 v2(5177.17,385.44)
  Bottom Layer w8: J8.8@3290,-126.57 3290,190 3331,231 3546,231 3740,425 v1(3785,425) 3848,488 v1(4007,488)
KEY4: J7.7 U1002.37 | length 1726.3
  Top Layer w8: U1002.37@1743.44,1320.47 1891.53,1320.47 1942,1270 3157,1270 3240,1187 3240,1083.27 J7.7@3290,1033.27
KEY4-1: D9.1 J8.7 R1020.1 SW4.1 | length 1784.6
  Top Layer w8: R1020.1@3700,370.24 v1(3700,425) D9.1@3700,479.02 ; v1(4039,529) 4182.56,385.44 v2(4271.65,385.44)
  Bottom Layer w8: J8.7@3290,-226.57 3240,-176.57 3240,182 3303,245 3540,245 3700,405 v1(3700,425) 3804,529 v1(4039,529)
KEY5: J7.6 U1002.17 | length 2101.6
  Top Layer w8: v1(1319.86,1153.14) U1002.17@1359.58,1153.14 ; v1@1923,1250 3149,1250 3190,1209 J7.6@3190,1133.27
  Bottom Layer w8: v1(1319.86,1153.14) 1334,1139 1898,1139 1920,1161 v1(1920,1248)
KEY5-1: D8.1 J8.6 R1019.1 SW5.1 | length 1037.5
  Top Layer w8: R1019.1@3031,369.5 v1(3031,425) ; v1@3031.24,425.24 D8.1@3031.24,480 ; v1(3191,148) 3190,149 3366.14,325.14 v2(3366.14,385.44)
  Bottom Layer w8: v1(3031,425) 3031,308 v1@3190,149 ; J8.6@3190,-126.57 v1@3190,148
KEY6: J7.5 U1002.16 | length 2173
  Top Layer w8: U1002.16@1271,1241.72 1359.72,1241.72 1447,1329 v1(1507,1329) ; v1(1889,1285) 1889,1236 1905,1220 3117,1220 3140,1197 3140,1083.27 J7.5@3190,1033.27
  Bottom Layer w8: v1(1507,1329) 1845,1329 v1(1889,1285)
KEY6-1: D7.1 J8.5 R1018.1 SW6.1 | length 1635.5
  Top Layer w8: v2(2460.63,385.44) 2608.07,238 3052,238 v1(3139,151) ; v1@2952.5,425.5 D7.1@2952.5,480 ; R1018.1@2953,369.24 v1(2953,425)
  Bottom Layer w8: v1(2953,425) 2953,337 v1(3139,151) 3139,-175.57 J8.5@3190,-226.57
KEY7: J7.4 U1002.15 | length 1998.6
  Top Layer w8: U1002.15@1271,1261.41 1352.41,1261.41 1448,1357 1539,1357 1552,1344 v1(1552,1303) ; v1(1890,1200) 3063,1200 3090,1173 J7.4@3090,1133.27
  Bottom Layer w8: v1(1552,1303) 1787,1303 v1(1890,1200)
KEY7-1: D6.1 J8.4 R1017.1 SW7.1 | length 2382.7
  Top Layer w8: v2(1555.12,385.44) 2416.56,385.44 2580,222 3017.8,222 3090,149.8 v1(3090,149) ; v1@2873.76,426.24 D6.1@2873.76,480 ; R1017.1@2875,369.98 v1(2875,425)
  Bottom Layer w8: v1(2875,425) 2875,364 v1(3090,149) J8.4@3090,-126.57
KEY8: J7.3 U1002.14 | length 2095.3
  Top Layer w8: U1002.14@1271,1281.09 1346.09,1281.09 1440,1375 1561,1375 1598,1338 v1(1598,1279) ; v1(1888,1163) 1907,1182 3019,1182 3040,1161 3040,1083.27 J7.3@3090,1033.27
  Bottom Layer w8: v1(1598,1279) 1772,1279 v1(1888,1163)
KEY8-1: D5.1 J8.3 R1016.2 SW8.1 | length 3373.2
  Top Layer w8: v2(649.61,385.44) 677.05,358 2424.2,358 2576.2,206 2980,206 v1(3040,146) ; R1016.2@2795,369.14 v1(2795,424) D5.1@2795.02,480
  Bottom Layer w8: v1(2795,424) 2795,391 v1(3040,146) 3040,-176.57 J8.3@3090,-226.57
LED1: R1012.1 U1002.8 | length 852.8
  Top Layer w8: 784,1651 784,1332.2 807.2,1309 1105,1309 1195.2,1399.2 U1002.8@1271,1399.2
LED2: R1013.1 U1002.9 | length 911.5
  Top Layer w8: R1013.1@722,1669 770,1621 770,1326.4 801.4,1295 1110.8,1295 1195.32,1379.52 U1002.9@1271,1379.52
LINE: C2004.2 C2020.2 C2021.2 | length 394.7
  Bottom Layer w10: C2021.2@5602.44,1096 5514.44,1096 C2004.2@5432,1178.44 5479.56,1226 C2020.2@5602.44,1226
LINEIN_1: J2002.4 R2039.1 R2040.2 R2041.1 | length 665.8
  Top Layer w10: R2041.1@6734.27,1390 6805.13,1319.13 R2040.2@6881,1319.13 7002.87,1319.13 J2002.4@7263,1059
LINEIN_OUT: C2005.2 R2054.2 R2063.2 R2064.2 R2067.2 R2068.1
LKJ1: R2004.1 U1002.10 | length 403.5
  Top Layer w8: v1(964,1267) 1102.6,1267 1195.43,1359.84 U1002.10@1271,1359.84
  Bottom Layer w8: R2004.1@913,1284 930,1267 v1(964,1267)
LKJ2: R2006.1 U1002.11 | length 434.7
  Top Layer w8: v1(967,1207) 1062.4,1207 1195.55,1340.15 U1002.11@1271,1340.15
  Bottom Layer w8: R2006.1@913,1155 915,1155 v1(967,1207)
LKJ3: R2010.1 U1002.24 | length 786.7
  Top Layer w8: U1002.24@1497.38,1153.14 v1(1497.38,1223.62)
  Bottom Layer w8: R2010.1@913,1542 940,1515 1206,1515 v1(1497.38,1223.62)
LKJ4: R2012.1 U1002.25 | length 899.9
  Top Layer w8: U1002.25@1517.06,1153.14 1517.06,1200.06 v1(1544,1227)
  Bottom Layer w8: R2012.1@913,1671 1100,1671 v1(1544,1227)
LKJ5: R2008.1 U1002.23 | length 702.3
  Top Layer w8: v1(1458,1224) 1477.69,1204.31 U1002.23@1477.69,1153.14
  Bottom Layer w8: R2008.1@913,1413 998,1413 1187,1224 v1(1458,1224)